# Altium PCB PCB2.PcbDoc
Units mil, origin at the board's own origin, x right, y up, seen from the top; angles counter-clockwise.
Board outline 2185.03 x 1568.57 mil, 2 copper layers (Top Layer, Bottom Layer); 49 components, 32 nets, 196 pads, 32 vias.
Unrouted connection lines stored in the file: 2.
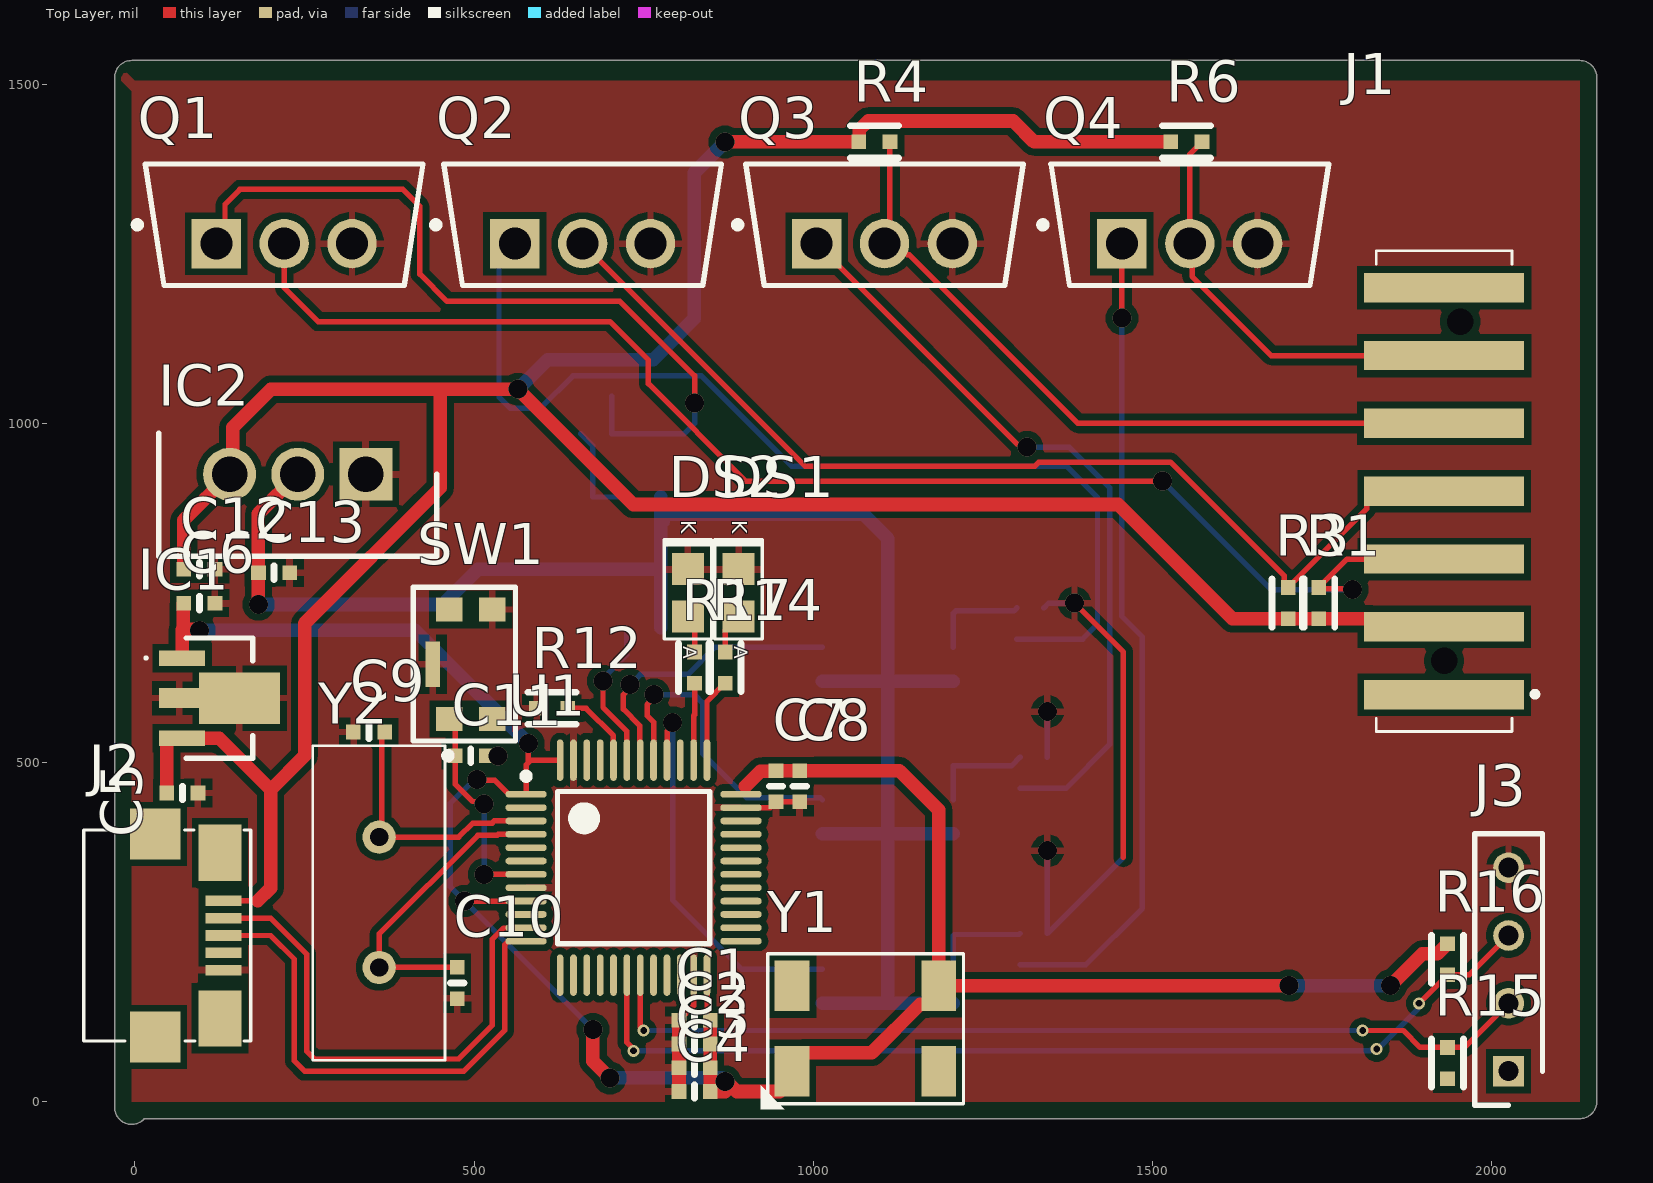
[diagram p0: Top Layer view]
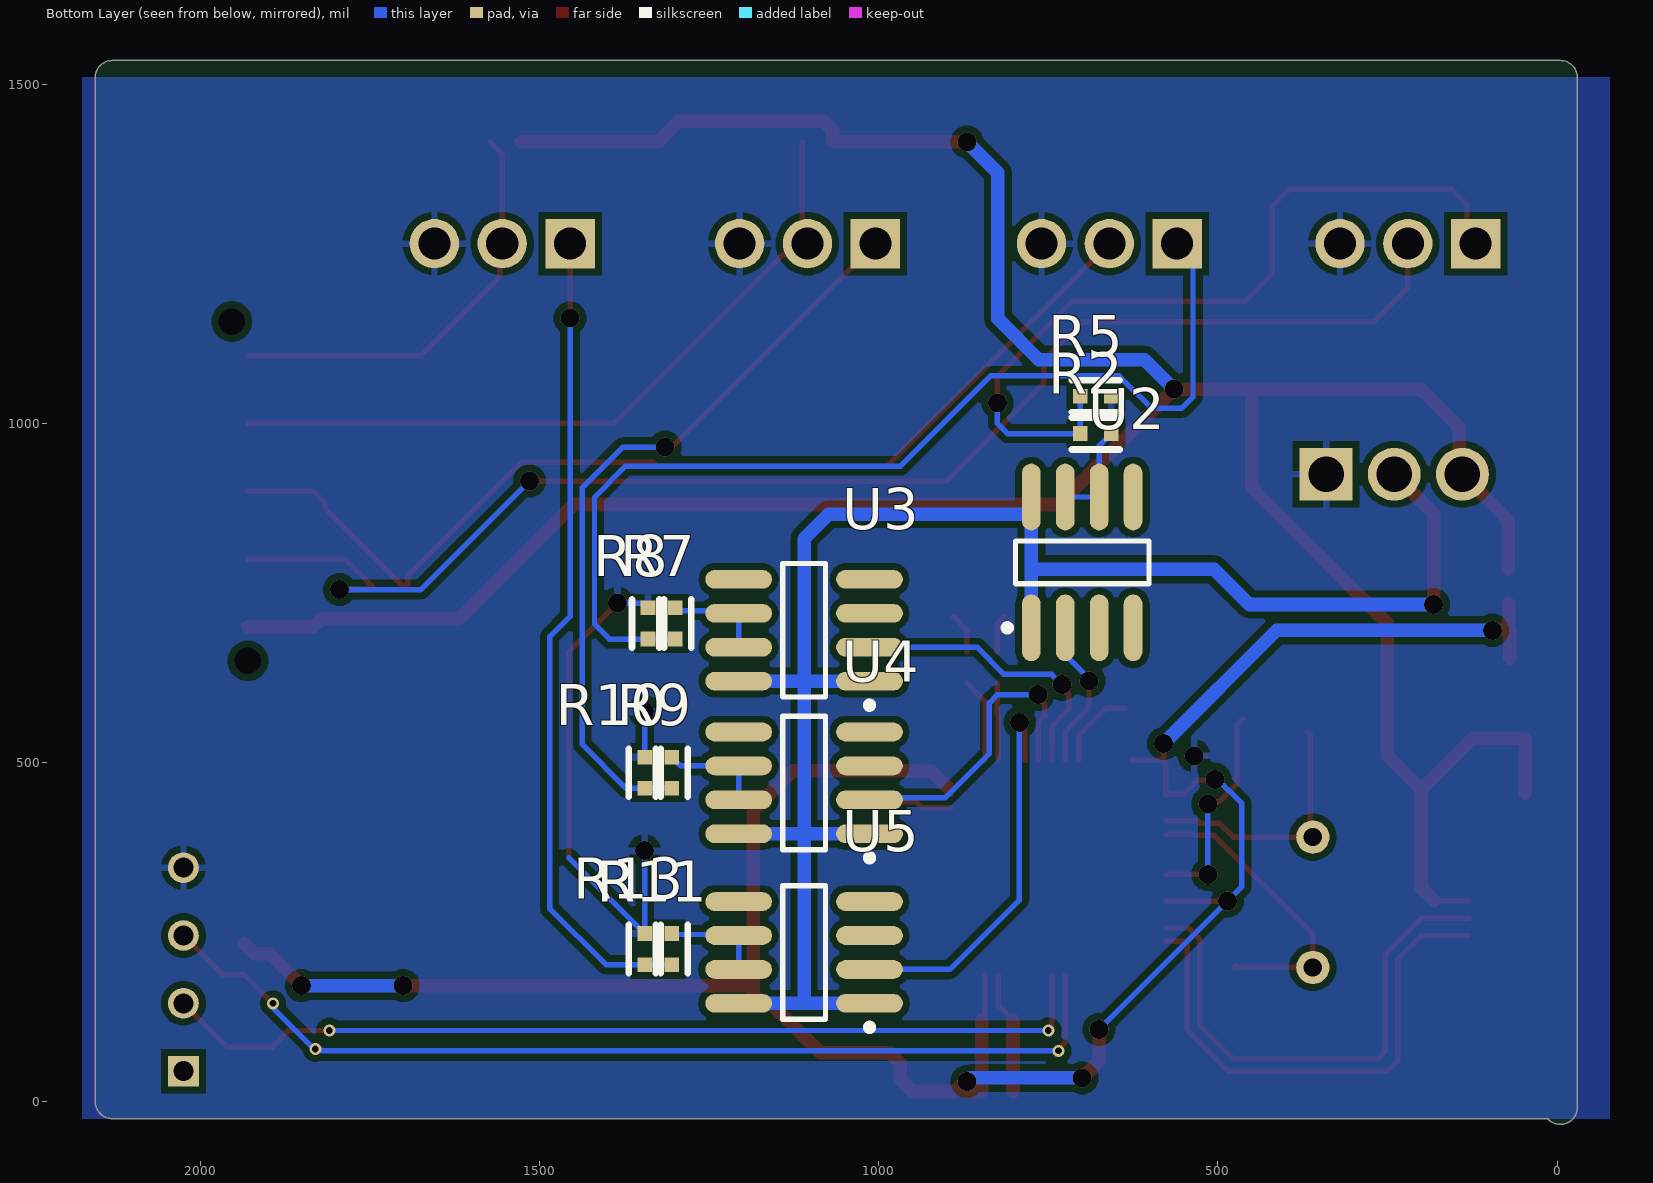
[diagram p1: Bottom Layer view, seen from below]
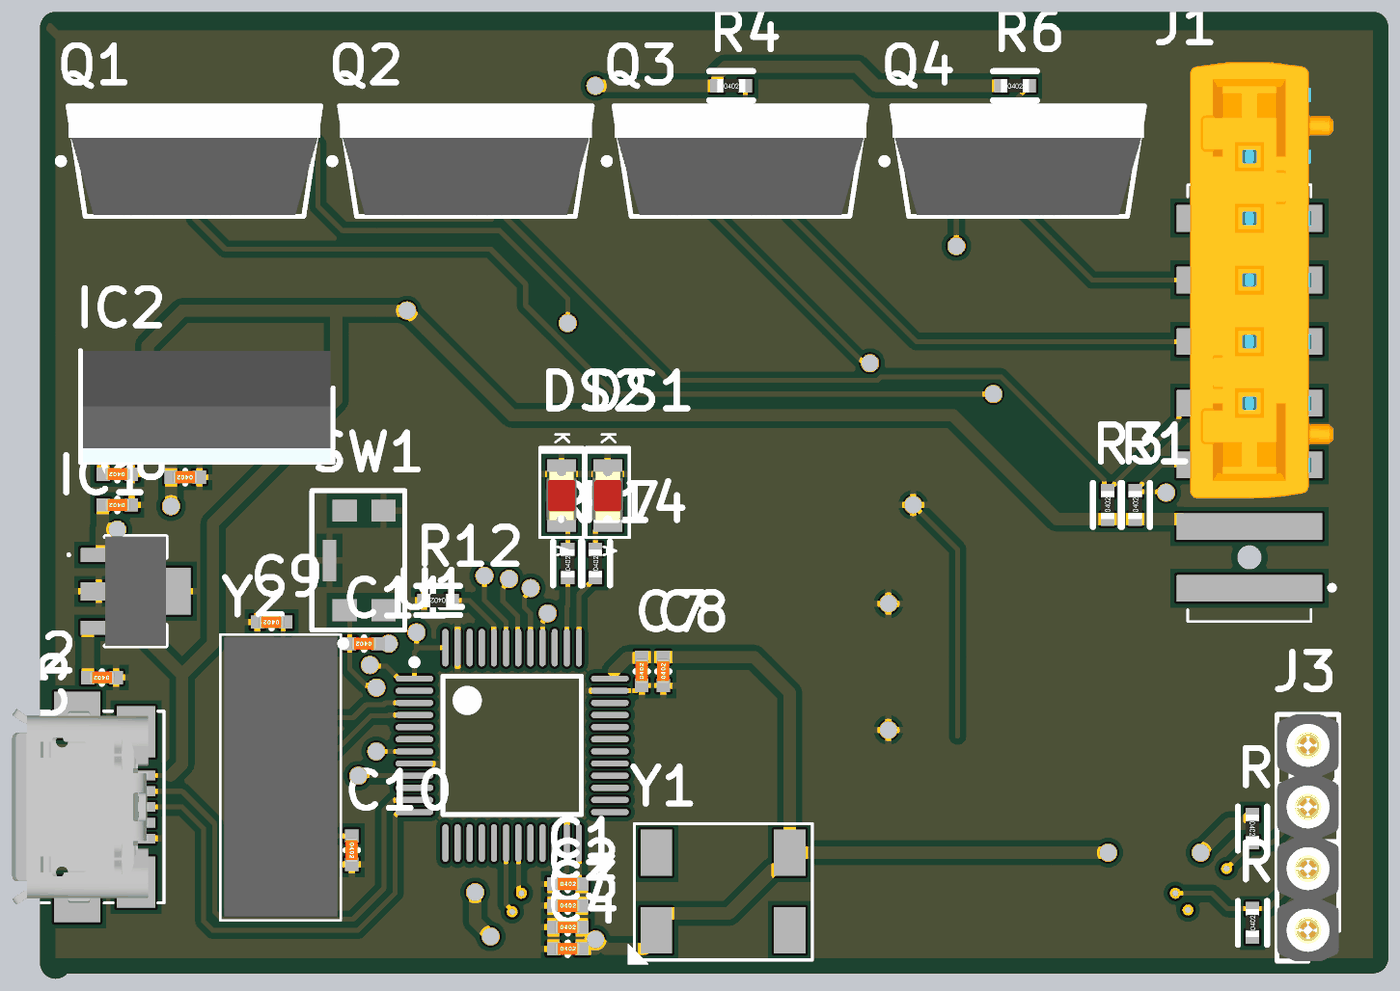
[diagram p2: 3D render of the assembled board from above, using the file's embedded part models]
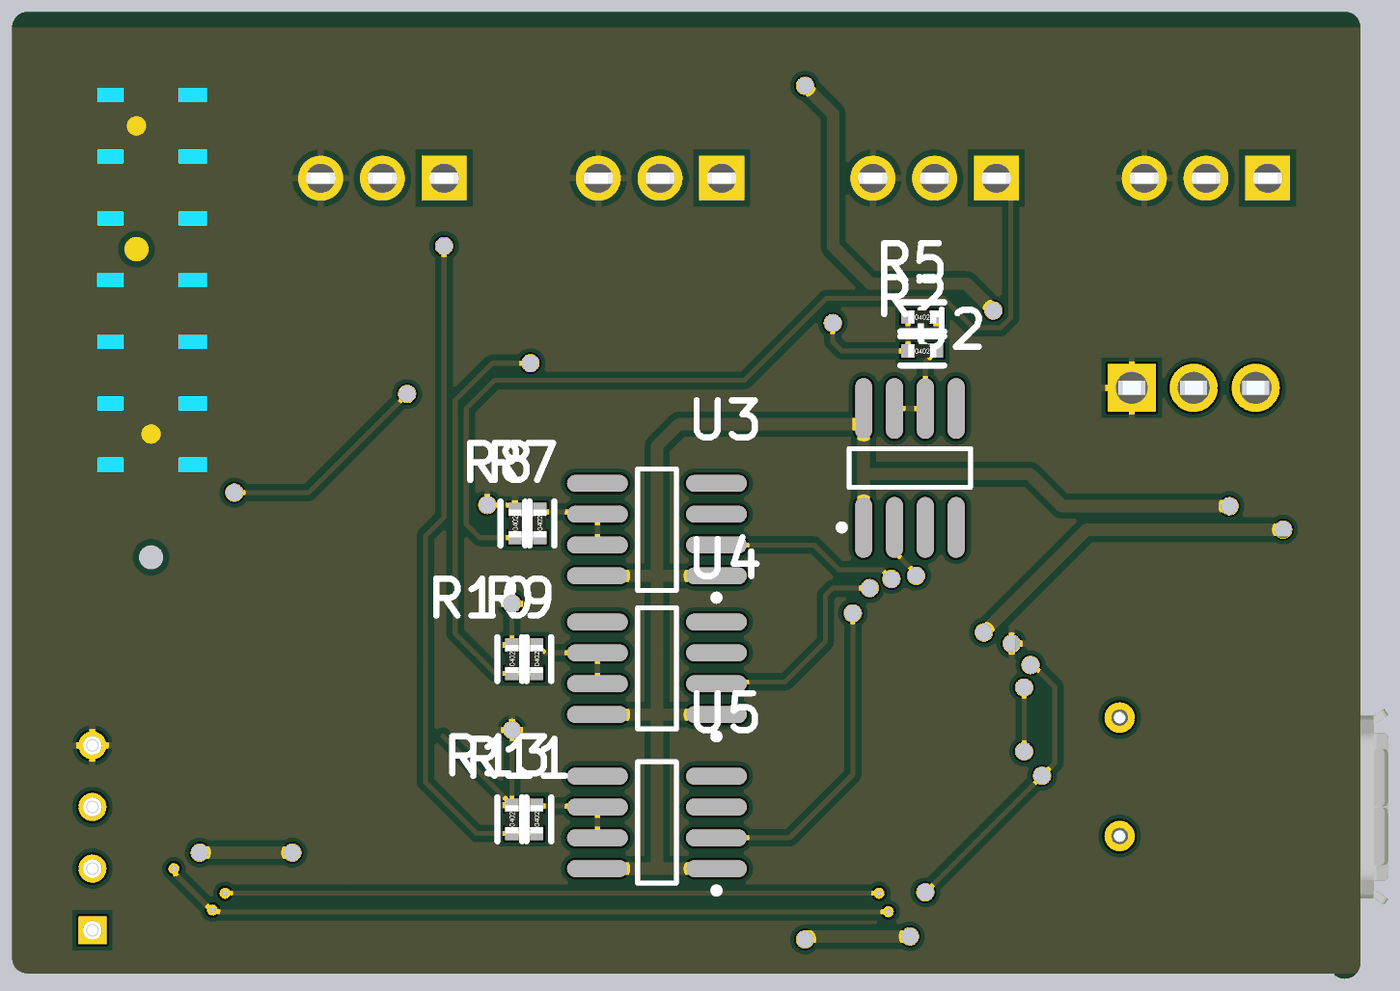
[diagram p3: 3D render of the assembled board from below, using the file's embedded part models]

## Layer stack, top to bottom
Top Solder: solder mask 0.4, Solder Resist, Dk 3.5
Top Layer: signal copper 1.4
Dielectric 1: dielectric 12.6, FR-4, Dk 4.8
Bottom Layer: signal copper 1.4
Bottom Solder: solder mask 0.4, Solder Resist, Dk 3.5

## Board outline
-30.01,-8.54 -30.01,1510 cw(c-5,1510) -5,1535.01 2130,1535.01 cw(c2130,1510) 2155.01,1510 2155.01,0 cw(c2130,0) 2130,-25.01 13.83,-25.01 cw(c-5,-8.54)

## Design rules (kind name [scope] priority, off if disabled: settings)
Clearance [All] p1: gap=10 ignorepadtopadclearanceinfootprint=TRUE except(0: Arc-Hole Track-Hole SMDPad-Hole THPad-Hole Via-Hole Fill-Hole Poly-Hole Region-Hole Text-Hole)
PolygonConnect [All] p1: connectstyle=Relief reliefconductorwidth=10 reliefentries=4 polygonreliefangle="90 Angle" airgapwidth=10
RoutingVias [All] p1: holewidth=28 width=50 viastyle="Through Hole" minholewidth=9.84 minwidth=17.72 maxholewidth=28 maxwidth=50
SolderMaskExpansion [All] p1: expansion=4 istentingtop=FALSE
Width [All] p1: maxlimit=30 minlimit=6 preferedwidth=10 minimp=50.000000 maximp=50.000000 favimp=50.000000
30 further rules are at their usual default settings.

## Components (designator, comment, footprint, x,y, rotation, side; value= is the part's Value field where it differs from the comment)
C1 "0.10µF" SMD-0402C 825,120 r270 top
C2 "0.10µF" SMD-0402C 825,85 r270 top
C3 "4.7µF" SMD-0402C 825,50 r270 top
C4 "0.10µF" SMD-0402C 825,15 r270 top
C5 "1µF" SMD-0402C 70,455 r90 top
C6 "10µF" SMD-0402C 95,735 r90 top
C7 "1µF" SMD-0402C 945,465 r0 top
C8 "10000pF" SMD-0402C 980,465 r0 top
C9 "18pF" SMD-0402C 345,545 r90 top
C10 "18pF" SMD-0402C 475,175 r180 top
C11 "0.10µF" SMD-0402C 495,510 r90 top
C12 "0.10µF" SMD-0402C 95,785 r90 top
C13 "10µF" SMD-0402C 205,780 r90 top
DS1 "RED LED" LED_0805 890,750 r270 top
DS2 "GREEN LED" LED_0805 815,750 r270 top
IC1 "AP7387Q-33Y-13" AP7387Q50Y13 124.65,595 r270 top
IC2 "LD1117V50C" TO255P460X1020X2008-3P 340.39,925 r180 top
J1 "14110513001000" 14110513001000 1930,900 r90 top
J2 "USB MICRO-B" CON_10118192-0001LF_SMD 80,245 r270 top
J3 "D01-9970442" RHDR4W53P0X254_1X4_1016X246X254P 2025,45 r90 top
Q1 "IRLZ44NPbF" FP-PG-TO220-3-MFG 220,1292.76 r90 top
Q2 "IRLZ44NPbF" FP-PG-TO220-3-MFG 660,1292.76 r90 top
Q3 "IRLZ44NPbF" FP-PG-TO220-3-MFG 1105,1292.76 r90 top
Q4 "IRLZ44NPbF" FP-PG-TO220-3-MFG 1555,1292.76 r90 top
R1 "10k" SMD-0402-RES 1745,735 r0 top
R2 "10" SMD-0402-RES 680,985 r270 bottom
R3 "10k" SMD-0402-RES 1700,735 r0 top
R4 "10k" SMD-0402-RES 1090,1415 r270 top
R5 "10k" SMD-0402-RES 680,1040 r270 bottom
R6 "10k" SMD-0402-RES 1550,1415 r270 top
R7 "10" SMD-0402-RES 1300,705 r180 bottom
R8 "10k" SMD-0402-RES 1340,705 r180 bottom
R9 "10" SMD-0402-RES 1305,485 r180 bottom
R10 "10k" SMD-0402-RES 1345,485 r180 bottom
R11 "10" SMD-0402-RES 1305,225 r180 bottom
R12 "10k" SMD-0402-RES 615,580 r90 top
R13 "10k" SMD-0402-RES 1345,225 r180 bottom
R14 "10k" SMD-0402-RES 870,640 r0 top
R15 "10k" SMD-0402-RES 1935,57 r0 top
R16 "10k" SMD-0402-RES 1935,210 r180 top
R17 "10k" SMD-0402-RES 825,640 r0 top
SW1 "KMR211GLFS" FP-KMR211GLFS-MFG 495,645 r90 top
U1 "STM32F103C8T6TR" STM-LQFP48_L 735,345 r0 top
U2 "TC4420EOA" SOIC-OA8_M 700,795 r90 bottom
U3 "TC4420EOA" SOIC-OA8_M 1110,695 r0 bottom
U4 "TC4420EOA" SOIC-OA8_M 1110,470 r0 bottom
U5 "TC4420EOA" SOIC-OA8_M 1110,220 r0 bottom
Y1 "MC-405 32.7680K-G3" XTAL_125_74X51_SMD 968.46,45 r0 top
Y2 "8 MHZ CRYSTAL" XTAL_193_184X455_TH 360,197.87 r90 top

## Footprints (in the part's own frame and the unit in brackets; to place one, negate y for a bottom-side part, rotate by r counter-clockwise, add the part's x,y. Pads: shape width x height; smd on the part's side, far side on the other; paste and mask are expansions set on the pad)
14110513001000 [mm]
  rect 1.1x6 smd: 1(-5.08,0) 2(-2.54,0) 3(0,0) 4(2.54,0) 5(5.08,0) MP1(-7.62,0) MP2(7.62,0)
  round 0.5 hole 1 unplated: MH1(-6.35,0) MH2(6.35,-0.6)
  silkscreen extent -9,-3.5 9.01,2.54, body extent -3.93,-3.45 14.09,2.45, height 6
AP7387Q50Y13 [mm]
  rect 0.58x1.73 smd: 1(-1.5,-1.4) 3(1.5,-1.4)
  rect 0.76x1.5 smd: 2(0,-1.515)
  rect 1.933x3.03 smd: 4(0,0.75)
  silkscreen extent -2.25,-2.8 2.25,1.25, body extent -2.25,-1.25 2.25,1.25, height 1.7
CON_10118192-0001LF_SMD [mm] "USB2.0 MICRO"
  rect 0.4x1.35 smd: 1(-1.3,1.275) 2(-0.65,1.275) 3(0,1.275) 4(0.65,1.275) 5(1.3,1.275)
  rect 2.1x1.6 smd: 6(-3.1,1.15) 7(3.1,1.15)
  rect 1.9x1.9 smd: 8(-3.8,-1.275) 9(3.8,-1.275)
  silkscreen extent -3.95,-3.94 3.95,2.3, body extent -4.04,-3.94 4.04,1.66, height 2.81
FP-KMR211GLFS-MFG [mm]
  rect 0.9x1 smd paste+0 mask+0: 1(-2.05,0.8) 2(2.05,0.8) 3(-2.05,-0.8) 4(2.05,-0.8)
  rect 1.7x0.55 smd paste+0 mask+0: 5(0,1.425)
  silkscreen extent -3.55,-1.68 2.88,2.15
FP-PG-TO220-3-MFG [mm]
  rect 1.85x1.85 hole 1.2 paste-1000 mask+0: 1(-0.705,2.54)
  round 1.85 hole 1.2 paste-1000 mask+0: 2(-0.705,0) 3(-0.705,-2.54)
  silkscreen extent -2.27,-5.2 2.27,5.62, body extent -2.37,-5.55 2.37,5.55, height 0.25
LED_0805 [mm] "LED"
  rect 1.2x1.2 smd mask+0.076: A(0.889,0) K(-0.889,0)
  silkscreen extent -1.99,-0.89 1.73,0.89, body extent -1.01,-0.62 1.01,0.63, height 1.1
RHDR4W53P0X254_1X4_1016X246X254P [mm]
  rect 1.15x1.15 hole 0.75: 1(0,0)
  round 1.15 hole 0.75: 2(2.54,0) 3(5.08,0) 4(7.62,0)
  silkscreen extent -1.27,-1.27 8.89,1.27, body extent -1.27,-1.27 8.89,1.27, height 4.2
SMD-0402-RES [mm]
  rect 0.55x0.55 smd: 1(0,0.584) 2(0,-0.584)
  silkscreen extent -0.6,-0.9 0.6,0.9, body extent -0.28,-0.57 0.27,0.58, height 0.41
SMD-0402C [mm]
  rect 0.55x0.55 smd: 1(0,0.584) 2(0,-0.584)
  silkscreen extent -0.25,0 0.25,0, body extent -0.25,-0.51 0.25,0.51, height 0.51
SOIC-OA8_M [mm] "SOIC, 8-Leads, Body 4.9x3.9mm, Pitch 1.27mm, IPC Low Density"
  oval 2.5x0.7 smd: 1(-2.45,1.905) 2(-2.45,0.635) 3(-2.45,-0.635) 4(-2.45,-1.905) 5(2.45,-1.905) 6(2.45,-0.635) 7(2.45,0.635) 8(2.45,1.905)
  silkscreen extent -2.57,-2.5 0.8,2.93, body extent -2,-2.5 2,2.5, height 1.75
STM-LQFP48_L [mm] "QFP, 48-Leads, Body 7x7mm, Pitch 0.5mm, IPC High Density"
  oval 1.55x0.25 smd: 1(-4.025,2.75) 2(-4.025,2.25) 3(-4.025,1.75) 4(-4.025,1.25) 5(-4.025,0.75) 6(-4.025,0.25) 7(-4.025,-0.25) 8(-4.025,-0.75) 9(-4.025,-1.25) 10(-4.025,-1.75) 11(-4.025,-2.25) 12(-4.025,-2.75) 25(4.025,-2.75) 26(4.025,-2.25) 27(4.025,-1.75) 28(4.025,-1.25) 29(4.025,-0.75) 30(4.025,-0.25) 31(4.025,0.25) 32(4.025,0.75) 33(4.025,1.25) 34(4.025,1.75) 35(4.025,2.25) 36(4.025,2.75)
  oval 0.25x1.55 smd: 13(-2.75,-4.025) 14(-2.25,-4.025) 15(-1.75,-4.025) 16(-1.25,-4.025) 17(-0.75,-4.025) 18(-0.25,-4.025) 19(0.25,-4.025) 20(0.75,-4.025) 21(1.25,-4.025) 22(1.75,-4.025) 23(2.25,-4.025) 24(2.75,-4.025) 37(2.75,4.025) 38(2.25,4.025) 39(1.75,4.025) 40(1.25,4.025) 41(0.75,4.025) 42(0.25,4.025) 43(-0.25,4.025) 44(-0.75,4.025) 45(-1.25,4.025) 46(-1.75,4.025) 47(-2.25,4.025) 48(-2.75,4.025)
  silkscreen extent -4.15,-2.85 2.85,3.55, body extent -3.5,-3.5 3.5,3.5, height 1.6
TO255P460X1020X2008-3P [mm]
  rect 1.98x1.98 hole 1.32: 1(0,0)
  round 1.98 hole 1.32: 2(2.55,0) 3(5.1,0)
  silkscreen extent -2.65,-1.53 7.75,3.07, body extent -2.55,-1.53 7.65,3.07, height 19.21
XTAL_125_74X51_SMD [mm]
  rect 1.3x1.9 smd: 1(0,0) 2(5.5,0) 3(5.5,3.2) 4(0,3.2)
  silkscreen extent -1.17,-1.42 6.43,4.39, body extent -0.9,-1.22 6.43,4.39, height 2.54
XTAL_193_184X455_TH [mm] "CASE: TH"
  round 1.247 hole 0.68: 1(0,0) 2(4.88,0)
  silkscreen extent -3.48,-2.46 8.31,2.49, body extent -3.31,-2.33 8.19,2.33, height 3.5

## Part data
C1 C2 C4: library part GRM152C80J104KE19D, "CAP CER 0.1UF 6.3V X6S 0402", Digi-Key Part Number=490-9997-1-ND, Manufacturer="Murata Electronics North America", Operating Temperature="-55°C ~ 105°C", Package / Case="0402 (1005 Metric)", Ratings=-, Temperature Coefficient=X6S, Tolerance=±10%, Voltage=6.3V, @ qty=0, Applications="General Purpose", Datasheets=http://www.murata.com/~/media/webrenewal/support/library/catalog/products/capacitor/mlcc/c02e.pdf, Factory Stock=0, Features="Derating Recommended", Height - Seated (Max)=-, Image=//media.digikey.com/Renders/Murata%20Renders/ZRB-SERIES-0402.jpg, Lead Spacing=-, Lead Style=-, Minimum Quantity=1, Mounting Type="Surface Mount, MLCC", Packaging="Cut Tape (CT)", Part Number=GRM152C80J104KE19D, Part Status=Active, Quantity Available=10685, Series=GRM, Size / Dimension="0.039\" L x 0.020\" W (1.00mm x 0.50mm)", Thickness (Max)="0.009\" (0.22mm)", Unit Price (USD)=0.15
C3: library part GRM153R60J475ME15D, "CAP CER 4.7UF 6.3V X5R 0402", Digi-Key Part Number=490-13232-1-ND, Manufacturer="Murata Electronics North America", Operating Temperature="-55°C ~ 85°C", Package / Case="0402 (1005 Metric)", Ratings=-, Temperature Coefficient=X5R, Tolerance=±20%, Voltage=6.3V, @ qty=0, Applications="General Purpose", Datasheets=http://psearch.en.murata.com/capacitor/product/GRM153R60J475ME15%23.pdf, Factory Stock=0, Features="Derating Recommended", Height - Seated (Max)=-, Image=//media.digikey.com/Renders/Murata%20Renders/ZRB-SERIES-0402.jpg, Lead Spacing=-, Lead Style=-, Minimum Quantity=1, Mounting Type="Surface Mount, MLCC", Packaging="Cut Tape (CT)", Part Number=GRM153R60J475ME15D, Part Status=Active, Quantity Available=30412, Series=GRM, Size / Dimension="0.039\" L x 0.020\" W (1.00mm x 0.50mm)", Thickness (Max)="0.013\" (0.33mm)", Unit Price (USD)=0.27
C5: library part GRT155R61E105KE01D, "CAP CER 1UF 25V X5R 0402", Digi-Key Part Number=490-12263-1-ND, Manufacturer="Murata Electronics North America", Operating Temperature="-55°C ~ 85°C", Package / Case="0402 (1005 Metric)", Ratings=AEC-Q200, Temperature Coefficient=X5R, Tolerance=±10%, Voltage=25V, @ qty=0, Applications=Automotive, Datasheets=http://search.murata.co.jp/Ceramy/image/img/A01X/G101/ENG/GRT155R61E105KE01-01.pdf, Factory Stock=0, Features="Derating Recommended", Height - Seated (Max)=-, Image=//media.digikey.com/Renders/Murata%20Renders/ZRB-SERIES-0402.jpg, Lead Spacing=-, Lead Style=-, Minimum Quantity=1, Mounting Type="Surface Mount, MLCC", Packaging="Cut Tape (CT)", Part Number=GRT155R61E105KE01D, Part Status=Active, Quantity Available=12190, Series=GRT, Size / Dimension="0.039\" L x 0.020\" W (1.00mm x 0.50mm)", Thickness (Max)="0.022\" (0.55mm)", Unit Price (USD)=0.12
C6 C13: library part GRM155C80J106ME11D, "CAP CER 10UF 6.3V X6S 0402", Digi-Key Part Number=490-13233-1-ND, Manufacturer="Murata Electronics North America", Operating Temperature="-55°C ~ 105°C", Package / Case="0402 (1005 Metric)", Ratings=-, Temperature Coefficient=X6S, Tolerance=±20%, Voltage=6.3V, @ qty=0, Applications="General Purpose", Datasheets=http://psearch.en.murata.com/capacitor/product/GRM155C80J106ME11%23.pdf, Factory Stock=0, Features="Derating Recommended", Height - Seated (Max)=-, Image=//media.digikey.com/Renders/Murata%20Renders/ZRB-SERIES-0402.jpg, Lead Spacing=-, Lead Style=-, Minimum Quantity=1, Mounting Type="Surface Mount, MLCC", Packaging="Cut Tape (CT)", Part Number=GRM155C80J106ME11D, Part Status=Active, Quantity Available=60962, Series=GRM, Size / Dimension="0.039\" L x 0.020\" W (1.00mm x 0.50mm)", Thickness (Max)="0.028\" (0.70mm)", Unit Price (USD)=0.18
C7: library part GCM155C71A105KE38D, "CAP CER 1UF 10V X7S 0402", Digi-Key Part Number=490-13409-1-ND, Manufacturer="Murata Electronics North America", Operating Temperature="-55°C ~ 125°C", Package / Case="0402 (1005 Metric)", Ratings=AEC-Q200, Temperature Coefficient=X7S, Tolerance=±10%, Voltage=10V, @ qty=0, Applications=Automotive, Datasheets=http://www.murata.com/~/media/webrenewal/support/library/catalog/products/capacitor/mlcc/c03e.ashx, Factory Stock=0, Features=-, Height - Seated (Max)=-, Image=//media.digikey.com/Renders/Murata%20Renders/ZRB-SERIES-0402.jpg, Lead Spacing=-, Lead Style=-, Minimum Quantity=1, Mounting Type="Surface Mount, MLCC", Packaging="Cut Tape (CT)", Part Number=GCM155C71A105KE38D, Part Status=Active, Quantity Available=7240, Series=GCM, Size / Dimension="0.039\" L x 0.020\" W (1.00mm x 0.50mm)", Thickness (Max)="0.022\" (0.55mm)", Unit Price (USD)=0.12
C8: library part GCM155R71E103KA37D, "CAP CER 10000PF 25V X7R 0402", Digi-Key Part Number=490-6043-1-ND, Manufacturer="Murata Electronics North America", Operating Temperature="-55°C ~ 125°C", Package / Case="0402 (1005 Metric)", Ratings=AEC-Q200, Temperature Coefficient=X7R, Tolerance=±10%, Voltage=25V, @ qty=0, Applications=Automotive, Datasheets=http://www.murata.com/~/media/webrenewal/support/library/catalog/products/capacitor/mlcc/c03e.ashx, Factory Stock=0, Features=-, Height - Seated (Max)=-, Image=//media.digikey.com/Renders/Murata%20Renders/ZRB-SERIES-0402.jpg, Lead Spacing=-, Lead Style=-, Minimum Quantity=1, Mounting Type="Surface Mount, MLCC", Packaging="Cut Tape (CT)", Part Number=GCM155R71E103KA37D, Part Status=Active, Quantity Available=128782, Series=GCM, Size / Dimension="0.039\" L x 0.020\" W (1.00mm x 0.50mm)", Thickness (Max)="0.022\" (0.55mm)", Unit Price (USD)=0.1
C9 C10: library part GRM1555C1E180JA01D, "CAP CER 18PF 25V NP0 0402", Digi-Key Part Number=490-6172-1-ND, Manufacturer="Murata Electronics North America", Operating Temperature="-55°C ~ 125°C", Package / Case="0402 (1005 Metric)", Ratings=-, Temperature Coefficient="C0G, NP0", Tolerance=±5%, Voltage=25V, @ qty=0, Applications="General Purpose", Datasheets=http://www.murata.com/~/media/webrenewal/support/library/catalog/products/capacitor/mlcc/c02e.pdf, Factory Stock=0, Features=-, Height - Seated (Max)=-, Image=//media.digikey.com/Renders/Murata%20Renders/ZRB-SERIES-0402.jpg, Lead Spacing=-, Lead Style=-, Minimum Quantity=1, Mounting Type="Surface Mount, MLCC", Packaging="Cut Tape (CT)", Part Number=GRM1555C1E180JA01D, Part Status=Active, Quantity Available=78161, Series=GRM, Size / Dimension="0.039\" L x 0.020\" W (1.00mm x 0.50mm)", Thickness (Max)="0.022\" (0.55mm)", Unit Price (USD)=0.1
C11: library part GRM152C80J104ME19D, "CAP CER 0.1UF 6.3V X6S 0402", Digi-Key Part Number=490-9998-1-ND, Manufacturer="Murata Electronics North America", Operating Temperature="-55°C ~ 105°C", Package / Case="0402 (1005 Metric)", Ratings=-, Temperature Coefficient=X6S, Tolerance=±20%, Voltage=6.3V, @ qty=0, Applications="General Purpose", Datasheets=http://www.murata.com/~/media/webrenewal/support/library/catalog/products/capacitor/mlcc/c02e.pdf, Factory Stock=0, Features="Derating Recommended", Height - Seated (Max)=-, Image=//media.digikey.com/Renders/Murata%20Renders/ZRB-SERIES-0402.jpg, Lead Spacing=-, Lead Style=-, Minimum Quantity=1, Mounting Type="Surface Mount, MLCC", Packaging="Cut Tape (CT)", Part Number=GRM152C80J104ME19D, Part Status=Active, Quantity Available=19095, Series=GRM, Size / Dimension="0.039\" L x 0.020\" W (1.00mm x 0.50mm)", Thickness (Max)="0.009\" (0.22mm)", Unit Price (USD)=0.15
C12: library part GCM155R71C104KA55D, "CAP CER 0.1UF 16V X7R 0402", Digi-Key Part Number=490-4759-1-ND, Manufacturer="Murata Electronics North America", Operating Temperature="-55°C ~ 125°C", Package / Case="0402 (1005 Metric)", Ratings=AEC-Q200, Temperature Coefficient=X7R, Tolerance=±10%, Voltage=16V, @ qty=0, Applications=Automotive, Datasheets=http://www.murata.com/~/media/webrenewal/support/library/catalog/products/capacitor/mlcc/c03e.ashx, Factory Stock=0, Features=-, Height - Seated (Max)=-, Image=//media.digikey.com/Renders/Murata%20Renders/ZRB-SERIES-0402.jpg, Lead Spacing=-, Lead Style=-, Minimum Quantity=1, Mounting Type="Surface Mount, MLCC", Packaging="Cut Tape (CT)", Part Number=GCM155R71C104KA55D, Part Status=Active, Quantity Available=734194, Series=GCM, Size / Dimension="0.039\" L x 0.020\" W (1.00mm x 0.50mm)", Thickness (Max)="0.022\" (0.55mm)", Unit Price (USD)=0.1
DS1: library part LED_RED-2V-20mA-0805, "Red 631nm LED Indication - Discrete 2V 0805 (2012 Metric)", Alternate Part Number-1=NA, Case/Package=0805, Manufacturer="Vishay Lite-On", Manufacturer Part Number=LTST-C171KRKT, Supplier Part Number-1=LTST-C171KRKT, Supplier-1="SP ROAD"
DS2: library part LED_GREEN-2.2-20mA-0805, "Green 569nm LED Indication - Discrete 2.1V 0805 (2012 Metric)", Alternate Part Number-1=NA, Case/Package=0805, Manufacturer="Vishay Lite-On", Manufacturer Part Number=LTST-C171GKT, Supplier Part Number-1=LTST-C171GKT, Supplier-1="SP ROAD"
IC1: "Integrated Circuit", Manufacturer_Name="Diodes Inc.", Mouser Part Number=621-AP7387Q-33Y-13, Datasheet Link=https://www.diodes.com/assets/Datasheets/AP7387Q.pdf, Height=1.6mm, Manufacturer_Part_Number=AP7387Q-33Y-13, Mouser Price/Stock=https://www.mouser.co.uk/ProductDetail/Diodes-Incorporated/AP7387Q-33Y-13?qs=Y0Uzf4wQF3kvZEnH8zEZig%3D%3D
IC2: "Integrated Circuit", Manufacturer_Name=STMicroelectronics, Mouser Part Number=511-LD1117V50C, Arrow Part Number=LD1117V50C, Arrow Price/Stock=https://www.arrow.com/en/products/ld1117v50c/stmicroelectronics, Datasheet Link=https://www.st.com/resource/en/datasheet/ld1117.pdf, Height=4.6mm, Manufacturer_Part_Number=LD1117V50C, Mouser Price/Stock=https://www.mouser.co.uk/ProductDetail/STMicroelectronics/LD1117V50C?qs=1tTY8DFIKADwAqdjtz3zSA%3D%3D
J1: "Connector", Manufacturer_Name=HARTING, Mouser Part Number=617-14110513001000, Arrow Part Number=14110513001000, Arrow Price/Stock=https://www.arrow.com/en/products/14110513001000/harting, Datasheet Link=https://b2b.harting.com/files/download/PRD/PDF_DS/PDF_DS_14111400301.pdf, Height=7.45mm, Manufacturer_Part_Number=14110513001000, Mouser Price/Stock=https://www.mouser.co.uk/ProductDetail/HARTING/14110513001000?qs=9nYkJLYMUzvq4GdFieWOAA%3D%3D
J2: library part CON_USB2.0_MICROB-SMD, "USB - micro B USB 2.0 Receptacle Connector 5 Position Surface Mount, Right Angle", Alternate Part Number-1=NA, Case/Package="USB MICRO-B SMD", Manufacturer=ICC, Manufacturer Part Number=10118192-0001LF, Supplier Part Number-1="MICRO USB", Supplier-1=SUNROM
J3: "Connector", Manufacturer_Name=Harwin, Mouser Part Number=855-D01-9970442, Datasheet Link=https://cdn.harwin.com/pdfs/D01-997.pdf, Height=2.54mm, Manufacturer_Part_Number=D01-9970442, Mouser Price/Stock=https://www.mouser.co.uk/ProductDetail/Harwin/D01-9970442?qs=ecHgFjcWJS%252BUW8IMx%252Bcpow%3D%3D
Q1 Q2 Q3 Q4: library part CMP-32901-000488-1, "MOSFET N-CH 55V 47A TO220AB", Case/Package=TO-220, Continuous Drain Current (ID)=47A, Drain to Source Breakdown Voltage=55V, Drain to Source Resistance=35mR, Gate to Source Voltage (Vgs)=16V, Input Capacitance=1.7nF, Max Operating Temperature=175°C, Max Power Dissipation=110W, Min Operating Temperature=-55°C, Threshold Voltage=2V, Drain to Source Voltage (Vdss)=55V, Element Configuration=Single, Halogen Free="Halogen Free", Height=0.6inch, Lead Free="Lead Free", Length=0.414inch, Max Dual Supply Voltage=55V, Mount="Through Hole", Number of Pins=3, Packaging=Rail/Tube, Power Dissipation=110W, Rds On Max=22mR, REACH SVHC="No SVHC", RoHS Compliant=Yes, Turn-Off Delay Time=26ns, Turn-On Delay Time=11ns, Width=0.185inch
R1 R3 R4 R5 R6 R8 R10 R12 R13 R14 R15 R16 R17: library part ERJ-2GEJ103X, "RES SMD 10K OHM 5% 1/10W 0402", Digi-Key Part Number=P10KJCT-ND, Manufacturer="Panasonic Electronic Components", Operating Temperature="-55°C ~ 155°C", Package / Case="0402 (1005 Metric)", Power (Watts)="0.1W, 1/10W", Supplier Device Package=0402, Temperature Coefficient=±200ppm/°C, Tolerance=±5%, @ qty=1500, Composition="Thick Film", Datasheets=http://industrial.panasonic.com/www-cgi/jvcr13pz.cgi?E+PZ+3+AOA0001+ERJ2GEJ103X+7+WW, Factory Stock=0, Failure Rate=-, Features="Automotive AEC-Q200", Height - Seated (Max)="0.016\" (0.40mm)", Image=//media.digikey.com/Photos/Panasonic%20Photos/ERJ-PA2-Series.jpg, Minimum Quantity=1, Number of Terminations=2, Packaging="Cut Tape (CT)", Part Number=ERJ-2GEJ103X, Part Status=Active, Quantity Available=2560215, Series=ERJ, Size / Dimension="0.039\" L x 0.020\" W (1.00mm x 0.50mm)", Unit Price (USD)=0.00350
R2 R7 R9 R11: library part ERJ-2RKF10R0X, "RES SMD 10 OHM 1% 1/10W 0402", Digi-Key Part Number=P10.0LCT-ND, Manufacturer="Panasonic Electronic Components", Operating Temperature="-55°C ~ 155°C", Package / Case="0402 (1005 Metric)", Power (Watts)="0.1W, 1/10W", Supplier Device Package=0402, Temperature Coefficient=±100ppm/°C, Tolerance=±1%, @ qty=1500, Composition="Thick Film", Datasheets=http://industrial.panasonic.com/www-cgi/jvcr13pz.cgi?E+PZ+3+AOA0002+ERJ2RKF10R0X+7+WW, Factory Stock=0, Failure Rate=-, Features="Automotive AEC-Q200", Height - Seated (Max)="0.016\" (0.40mm)", Image=//media.digikey.com/Photos/Panasonic%20Photos/ERJ-PA2-Series.jpg, Minimum Quantity=1, Number of Terminations=2, Packaging="Cut Tape (CT)", Part Number=ERJ-2RKF10R0X, Part Status=Active, Quantity Available=1668494, Series=ERJ, Size / Dimension="0.039\" L x 0.020\" W (1.00mm x 0.50mm)", Unit Price (USD)=0.00496
SW1: library part CMP-10040-000023-1, "SWITCH TACTILE SPST-NO 0.05A 32V", Contact Current Rating=50mA, Max Operating Temperature=85°C, Max Voltage Rating (DC)=32V, Min Operating Temperature=-40°C, Operating Force=1.2N, Package Quantity=1, Power Rating=1W, Actuator Length=0.5mm, Actuator Type=Standard, Contact Material=Silver, Contact Plating=Silver, Current Rating=50mA, Depth=4.6mm, Illumination Type=Non-Illuminated, Lead Free="Lead Free", Length=2.8mm, Max Current Rating=50mA, Mechanical Life=200000Cycles, Mount="Surface Mount", Orientation=Straight, Packaging="Tape and Reel", Radiation Hardening=No, REACH SVHC="No SVHC", Switch Function=Off-Mom, Switch Travel=0.2mm, Termination="Gull Wing", Throw Configuration=SPST, Voltage Rating (DC)=32V, Width=2.8mm
U1: library part CMP-0237-00216-3, "ARM Cortex-M3 32-bit MCU, 64 KB Flash, 20 KB Internal RAM, 37 I/Os, 48-pin LQFP, -40 to 85 degC, Tape and Reel", I/Os (High Current)=37, Operating Frequency(F) (Processor speed) (MHz)=72, Supply Voltage(Vcc) min (V)=2, A/D Converter="2x12-bit (10 Channel)", ComponentLink1Description="Manufacturer URL", ComponentLink1URL=http://www.st.com/web/en/home.html, ComponentLink2Description=Datasheet, ComponentLink2URL=http://www.st.com/st-web-ui/static/active/en/resource/technical/document/datasheet/CD00161566.pdf, ComponentLink3Description="Package Specification", ComponentLink3URL=http://www.st.com/st-web-ui/static/active/en/resource/technical/document/datasheet/DM00058181.pdf, Core="ARM Cortex-M3", DatasheetVersion="Rev. 16", FLASH Size (Prog) (kB)=64, Internal RAM Size (kB)=20, Mounting Technology="Surface Mount", PackageDescription="48-Pin Low Profile Quad Flat Package, 7 x 7 mm Body, 0.5 mm Pitch", PackageReference=LQFP48, PackageVersion="Rev. 6, 06/2013", Packing="Tape and Reel", PartNumber=STM32F103C8T6TR
U2 U3 U4 U5: library part CMP-0137-00254-1, "6A High-Speed MOSFET Driver, Non-Inverting, Industrial Temperature", Code_IPC=SOIC127P600-8, DatasheetVersion="revC, Aug-2004", PackageDescription="8-Lead Plastic Small Outline (OA) - Narrow, 3.90mm Body [SOIC]", PackageReference=SOIC-OA8, PackageVersion="revBB, Aug-2009"
Y1: library part "XTAL_32.768K-MC-405 32.7680K-G3", "32.768kHz ±100ppm Crystal 20pF 50 kOhms 4-SOJ, 5.50mm pitch", Alternate Part Number-1="MC-405 32.7680K-AC0: ROHS", Case/Package=4-SOJ, Manufacturer=EPSON, Supplier Part Number-1=732-MC405327680KG3RS, Manufacturer Part Number="MC-405 32.7680K-G3", Supplier-1=Mouser
Y2: library part XTAL_8MHZ-ABL-8.000MHZ-B2, "8MHz ±20ppm Crystal 18pF 80 Ohms HC-49/US", Alternate Part Number-1=NA, Case/Package=TH, Manufacturer="Yangxing Tech", Manufacturer Part Number=ABL-8.000MHZ-B2, Supplier Part Number-1=ABL-8.000MHZ-B2, Supplier-1="SP ROAD"

## Via types
v1: diameter 28, hole 28, Top Layer to Bottom Layer, 27 vias
v2: diameter 17.72, hole 9.84, Top Layer to Bottom Layer, 5 vias

## Nets (pads, with @x,y where several pads share a name; then routed paths per layer and width w, separated by ;. In a path a pad name is that pad's centre, name@x,y a point inside that pad or via, vN(x,y) a via of type N, cw(c..) or ccw(c..) an arc to the next point about the centre after c; other vN are vias at no path point)
3.3V: C1.1 C2.1 C3.1 C4.1 C6.1 C7.1 C8.1 IC1.1 J3.1 R15.2 R16.2 U1.1 U1.9 U1.24 U1.36 U1.48 Y1.1 Y1.3 | length 3664.3
  Top Layer w8: v1(485.79,295.79) U1.9 ; v1(504.47,475.33) 506.05,473.74 530.47,473.74 550.94,453.27 U1.1 576.54,496.54 580,500 ; v1(580,528.23) 580,500 ; U1.48 583.46,503.46 580,500 ; U1.24 843.62,186.18 843.62,124.38 C1.1 ; U1.36 899.15,453.27 900,454.12 900,465
  Top Layer w20: IC1.1 69.53,695.47 71.17,697.12 ; C6.1 71.17,734.17 71.17,697.12 ; v1(95,695) 93.47,696.53 71.76,696.53 71.17,697.12 ; v1(675,106.57) 675,60 v1(700,35) ; C1.1 C2.1 C3.1 C4.1 870,15 ; v1(870,30) 872.16,30 887.16,15 950.28,15 968.46,33.19 Y1.1 968.46,56.81 984.06,72.4 1086.42,72.4 1157.6,143.58 1169.41,143.58 1185,159.17 Y1.3 ; 900,465 922.17,487.17 944.17,487.17 C7.1 C8.1 1127,488 1185,430 Y1.3 ; v1(1700.98,170.98) Y1.3 ; v1(1850.98,170.98) 1897.83,217.83 1919.83,217.83 R16.2
  Bottom Layer w8: v1@508.3,479.15 v1(504.47,475.33) 500.33,475.33 465,440 465,316.57 v1(485.79,295.79) v1(675,106.57)
  Bottom Layer w20: v1(95,695) 413.23,695 v1(580,528.23) ; v1(700,35) 865,35 v1(870,30) ; v1(1700.98,170.98) v1(1850.98,170.98)
5V: C13.1 IC2.2 U2.1 U2.8 U3.1 U3.8 U4.1 U4.8 U5.1 U5.8 | length 2656.7
  Top Layer w20: v1(182,733) C13.1 182,867 IC2.2 IC2.2@235,930
  Bottom Layer w20: v1(182,733) 453.58,733 505.58,785 775,785 ; U2.1 775,785 ; U2.8 U2.8@775,858.49 ; U5.1 1110,145 ; U4.1 1110,395 ; U3.1 1110,620 ; U5.8 1110,145 ; U4.8 1110,395 ; U3.8 1110,620 ; 775,785 U2.8@775,858.49 ; U2.8@775,858.49 778.49,855 778.49,866.02 1073.98,866.02 1110,830 1110,620 ; 1110,145 1110,395 ; 1110,395 1110,620
15V: C5.1 C12.1 IC1.3 IC2.3 J1.1 J2.1 R1.2 R3.2 R4.2 R6.2 | length 4649.3
  Top Layer w8: J2.1 181.18,296.18
  Top Layer w20: C5.1 47,534.53 48.42,535.94 IC1.3 124.06,535.94 200,460 ; C12.1 72,857.39 IC2.3 143.98,929.37 143.98,993.98 200.38,1050.38 450,1050.38 ; 181.18,296.18 200,315 200,460 ; v1(870,1415) R4.2 1067.83,1415.83 1067.83,1432.83 1080.83,1445.83 1294.62,1445.83 1325.44,1415 R6.2 ; J1.1 1833.54,700 1821.54,712 R1.2 R3.2 1618,712 1449.57,880.43 734.57,880.43 v1(564.62,1050.38) 450,1050.38 ; 200,460 250,510 250,705 450,905 450,1050.38
  Bottom Layer w20: v1(564.62,1050.38) 608.23,1094 764,1094 824.23,1154.23 824.23,1369.23 v1(870,1415)
BOOT0: R12.2 U1.44 | length 120.3
  Top Layer w8: R12.2 665,580 705.12,539.88 705.12,503.82 U1.44
DN: J2.2 U1.11 | length 770.2
  Top Layer w8: J2.2 199.87,270.59 253,217.46 253,74.69 264.69,63 477.05,63 527,112.95 527,239.55 543.52,256.06 576.18,256.06 U1.11
DP: J2.3 U1.12 | length 770.3
  Top Layer w8: J2.3 200,245 235,210 235,60 250,45 485,45 545,105 545,231.12 550.61,236.73 U1.12
GND: C1.2 C2.2 C3.2 C4.2 C5.2 C6.2 C7.2 C8.2 C9.1 C10.1 C11.2 C12.2 C13.2 DS1.K DS2.K IC1.2 IC1.4 IC2.1 J2.5 J3.4 Q1.3 Q2.3 Q3.3 Q4.3 R5.1 R8.1 R10.1 R12.1 R13.1 SW1.4 SW1.5 U1.8 U1.23 U1.35 U1.47 | length 1087.6
  Top Layer w8: C11.2 v1(535,510) ; C1.2 823.58,141.58 U1.23 ; U1.35 936.58,433.58 C7.2 C8.2 ; v1(1385,735) 1457,663 1457,360
  Top Layer w20: C4.2 C3.2 C2.2 C1.2
  Bottom Layer w8: R8.1 1346.83,734.83 1358.83,734.83 1359,735 v1(1385,735) ; v1(1345,370) R13.1 1457,360 ; R10.1 v1(1345,575)
NetC9_2: C9.2 U1.3 Y2.2 | length 384.7
  Top Layer w8: C9.2 364,541 364,394 Y2.2 364,390 477.2,390 497.97,410.77 526.44,410.77 529.57,413.9 U1.3
NetC10_2: C10.2 U1.4 Y2.1 | length 444.7
  Top Layer w8: C10.2 474.94,197.94 360.06,197.94 Y2.1 360,247.34 505.43,392.77 533.9,392.77 535.34,394.21 U1.4
  Top Layer w10: C10.2@473,200 C10.2
NetC11_1: C11.1 SW1.1 U1.7 | length 319.9
  Top Layer w8: SW1.1 472,555.8 472,468.2 497.6,442.6 511.02,442.6 v1(514.84,438.77) ; v1(514.84,335.16) U1.7
  Bottom Layer w8: v1(514.84,335.16) v1(514.84,438.77)
NetDS1_A: DS1.A R14.1 | length 60.3
  Top Layer w8: R14.1 870,695 DS1.A
NetDS2_A: DS2.A R17.1 | length 56.1
  Top Layer w8: DS2.A 825,705 R17.1
NetJ1_2: J1.2 Q1.2 R1.1 | length 2098.2
  Top Layer w8: Q1.2 220,1200 270,1150 700,1150 756.7,1093.3 756.7,1058.7 900.4,915 v1(1515,915) ; v1(1795,755) 1793.5,756.5 1746.5,756.5 R1.1 1787,800 J1.2
  Bottom Layer w8: v1(1515,915) 1675,755 v1(1795,755)
NetJ1_3: J1.3 Q2.2 R3.1 | length 1555.5
  Top Layer w8: Q2.2 988,937 1326.6,937 1332.6,943 1526.6,943 1694.49,775.11 1694.49,763.51 R3.1 1815.89,873.89 1815.89,882.35 1833.54,900 J1.3
NetJ1_4: J1.4 Q3.2 R4.1 | length 1088.1
  Top Layer w8: R4.1 1113,1273 Q3.2 1122.54,1265 1138.78,1248.76 1141.24,1248.76 1390,1000 J1.4
NetJ1_5: J1.5 Q4.2 R6.1 | length 627.2
  Top Layer w8: R6.1 1555,1397 Q4.2 1558.42,1261.58 1558.42,1216.58 1675,1100 J1.5
NetQ1_1: Q1.1 R2.2 R5.2 | length 1190.4
  Top Layer w8: Q1.1 132.69,1277.69 132.69,1323.01 154.69,1345 395,1345 420,1320 420,1220 460,1180 715,1180 825,1070 v1(825,1030)
  Bottom Layer w8: R5.2 R2.2 810,985 825,1000 v1(825,1030)
NetQ2_1: Q2.1 R7.2 R8.2 | length 1534.1
  Bottom Layer w8: Q2.1 536.62,1241.62 536.62,1038.78 553.02,1022.38 597.93,1022.38 645.55,1070 835,1070 968,937 1373,937 1419,891 1419,704 1397,682 R8.2 R7.2
NetQ3_1: Q3.1 R9.2 R10.2 | length 1118.5
  Top Layer w8: Q3.1 1301.17,968.83 1311.17,968.83 v1(1315,965)
  Bottom Layer w8: R9.2 R10.2 1372.4,462 1437,526.6 1437,905.31 1377.31,965 v1(1315,965)
NetQ4_1: Q4.1 R11.2 R13.2 | length 1206.8
  Top Layer w8: v1(1455,1155) Q4.1
  Bottom Layer w8: R11.2 R13.2 1402,202 1485,285 1485,685.29 1455,715.29 v1(1455,1155)
NetR2_1: R2.1 U2.6 U2.7 | length 151
  Bottom Layer w8: R2.1 675,967 U2.6 U2.7
NetR7_1: R7.1 U3.6 U3.7 | length 146.9
  Bottom Layer w8: U3.7 U3.6 1210.2,723.74 1295.74,723.74 R7.1
NetR9_1: R9.1 U4.6 U4.7 | length 153.9
  Bottom Layer w8: U4.7 U4.6 1292,495 R9.1
NetR11_1: R11.1 U5.6 U5.7 | length 149.8
  Bottom Layer w8: U5.7 U5.6 1207.96,246.5 1303.5,246.5 R11.1
PA14: R14.2 U1.37 | length 124.6
  Top Layer w8: U1.37 843.27,590.27 R14.2
PA15: R17.2 U1.38 | length 114.1
  Top Layer w8: U1.38 823.58,569.15 825,570.57 R17.2
PB4: U1.40 U5.2 | length 585.5
  Top Layer w8: U1.40 784.57,503.82 784.57,545.84 792.53,553.8 v1(792.53,559.21) v1@791.74,560
  Bottom Layer w8: v1(792.53,559.21) 792.53,297.47 895,195 U5.2
PB5: U1.41 U4.2 | length 461.3
  Top Layer w8: U1.41 764.53,559.53 755,569.06 755,585.31 765,595.31 v1(765,600)
  Bottom Layer w8: v1(765,600) 825,600 836.91,588.09 836.91,513.09 902,448 1010.54,448 U4.2
PB6: U1.42 U3.2 | length 432.3
  Top Layer w8: v1(730,615) 730,610.31 720,600.31 720,578.6 744.08,554.52 744.08,531.12 744.49,530.71 744.49,503.82 U1.42
  Bottom Layer w8: v1(730,615) 745,630 815,630 855,670 U3.2
PB7: U1.43 U2.2 | length 224.1
  Top Layer w8: v1(690,620) 690,581.13 725.16,545.98 U1.43
  Bottom Layer w8: v1(690,620) 690,624.06 725,659.06 U2.2
SWDCLK: J3.3 R16.1 U1.18 | length 1478
  Top Layer w8: U1.18 725.16,87.47 735,77.63 v2(735,75) ; v2(1893,145) R16.1 1967,187 J3.3
  Bottom Layer w8: v2(735,75) 1820.89,75 1821.85,75.96 1828.58,75.96 v2(1830.44,77.82) ; v2@1832.18,77.82 1891.14,136.78 1891.14,143.14 v2(1893,145)
SWDIO: J3.2 R15.1 U1.19 | length 1396
  Top Layer w8: U1.19 745.19,186.18 745.19,109.81 v2(750,105) ; v2(1810,105) 1869.77,105 1894.77,80 1960,80 J3.2
  Bottom Layer w8: v2(750,105) v2(1810,105)
pads on no net: J1.MH1 J1.MH2 J1.MP1 J1.MP2 J2.4 J2.6 J2.7 J2.8 J2.9 SW1.2 SW1.3 U1.2 U1.5 U1.6 U1.10 U1.13 U1.14 U1.15 U1.16 U1.17 U1.20 U1.21 U1.22 U1.25 U1.26 U1.27 U1.28 U1.29 U1.30 U1.31 U1.32 U1.33 U1.34 U1.39 U1.45 U1.46 U2.3 U2.4 U2.5 U3.3 U3.4 U3.5 U4.3 U4.4 U4.5 U5.3 U5.4 U5.5 Y1.2 Y1.4

## Polygon pours and split planes (outlines as drawn)
GND on Top Layer "GND_L01_P000" (solid, remove dead copper, pour order 0): -15,1520 0,1505 2130,1505 2130,0.37 2130.37,0 -5,0 -5,1490 -20,1505 -20,1510
GND on Bottom Layer "GND_L02_P001" (solid, pour order 1): -77.41,1510 2173.83,1510 2173.83,-25.01 2015,-25.01 -77.41,-25.01 -77.41,1405 -77.41,1515

## Silkscreen, mask and mechanical layers (free items; w line width, h text height)
Mechanical 1:
  lines w47.24: -5.88,15.88 0,10 ; 5950,3325 5970,3345
  lines w50: -5,-8.54 -5,1510 2130,1510 2130,0 -5,0

## Text inside footprints (layer, text, board x,y; h text height)
DS1: Top Overlay "K" at 880.15,857.28 h22 r270; Top Overlay "A" at 883.11,671.75 h20 r270
DS2: Top Overlay "K" at 805.15,857.28 h22 r270; Top Overlay "A" at 808.11,671.75 h20 r270